# Altium PCB PCB2.PcbDoc
Units mm, origin at the board's own origin, x right, y up, seen from the top; angles counter-clockwise.
Board outline 112.65 x 45.59 mm, 2 copper layers (Top Layer, Bottom Layer); 16 components, 10 nets, 45 pads, 0 vias.
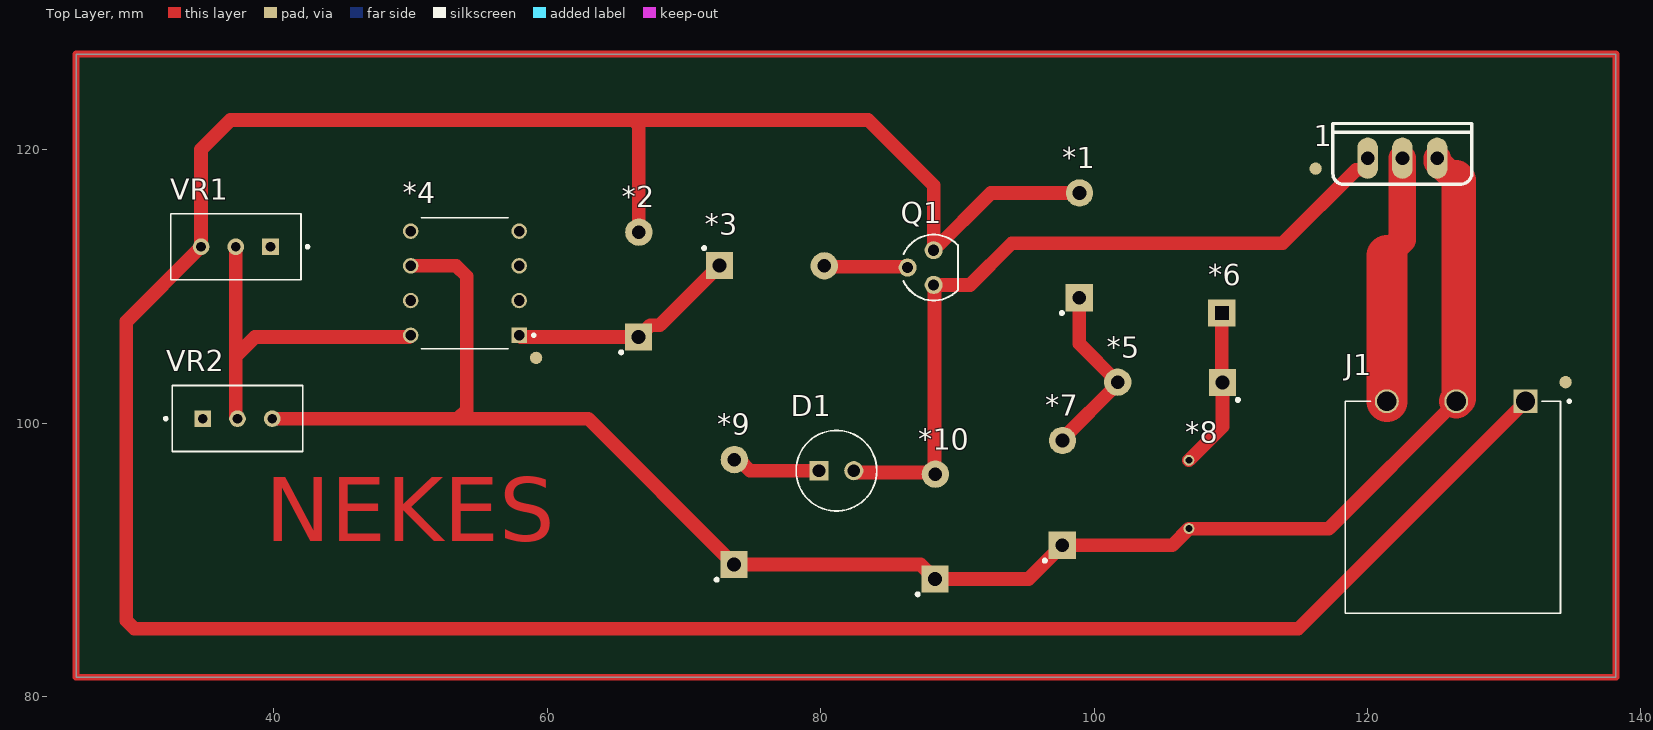
[diagram p0: Top Layer view]
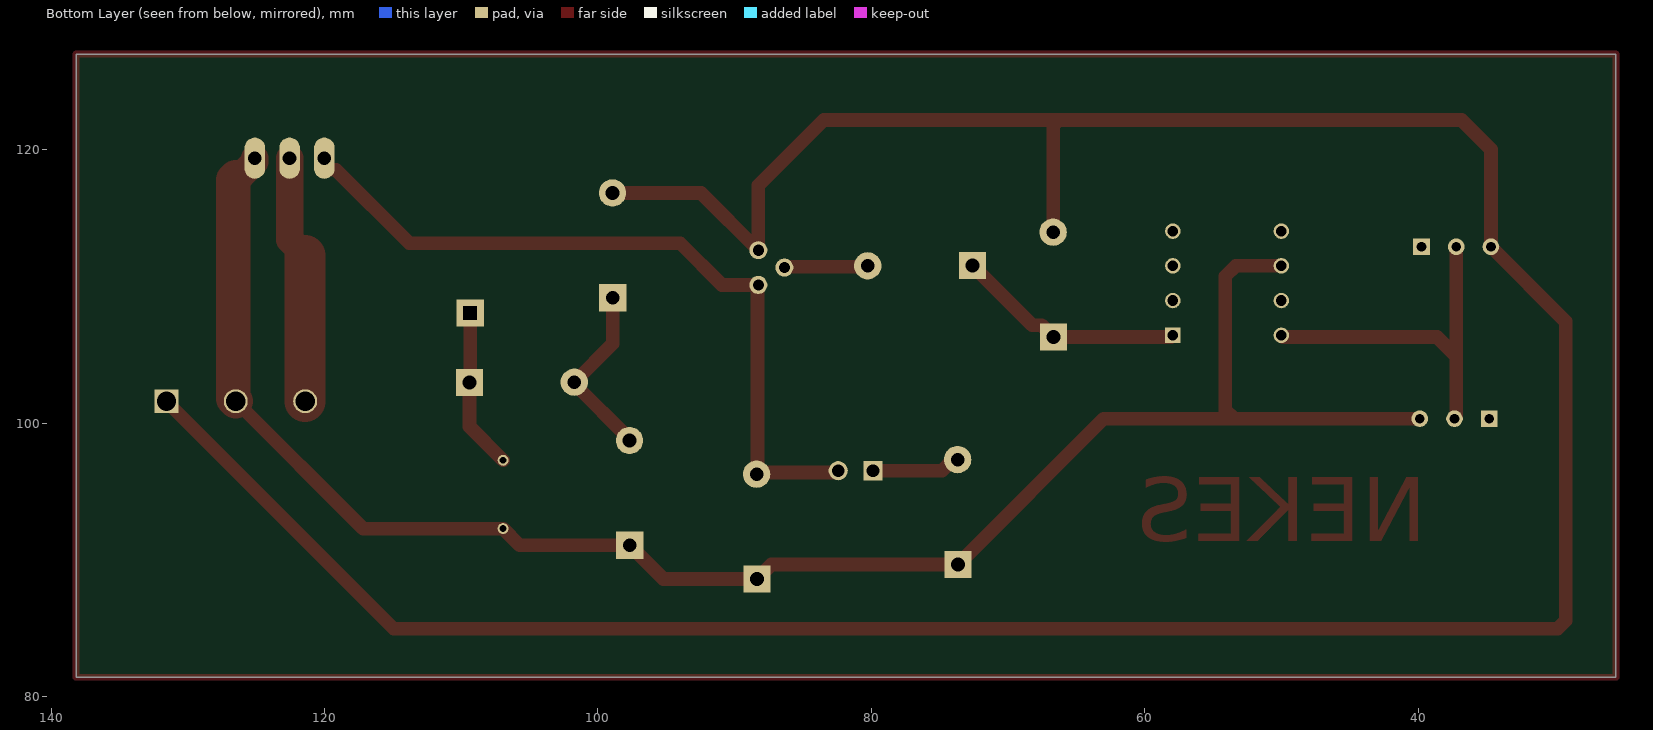
[diagram p1: Bottom Layer view, seen from below]
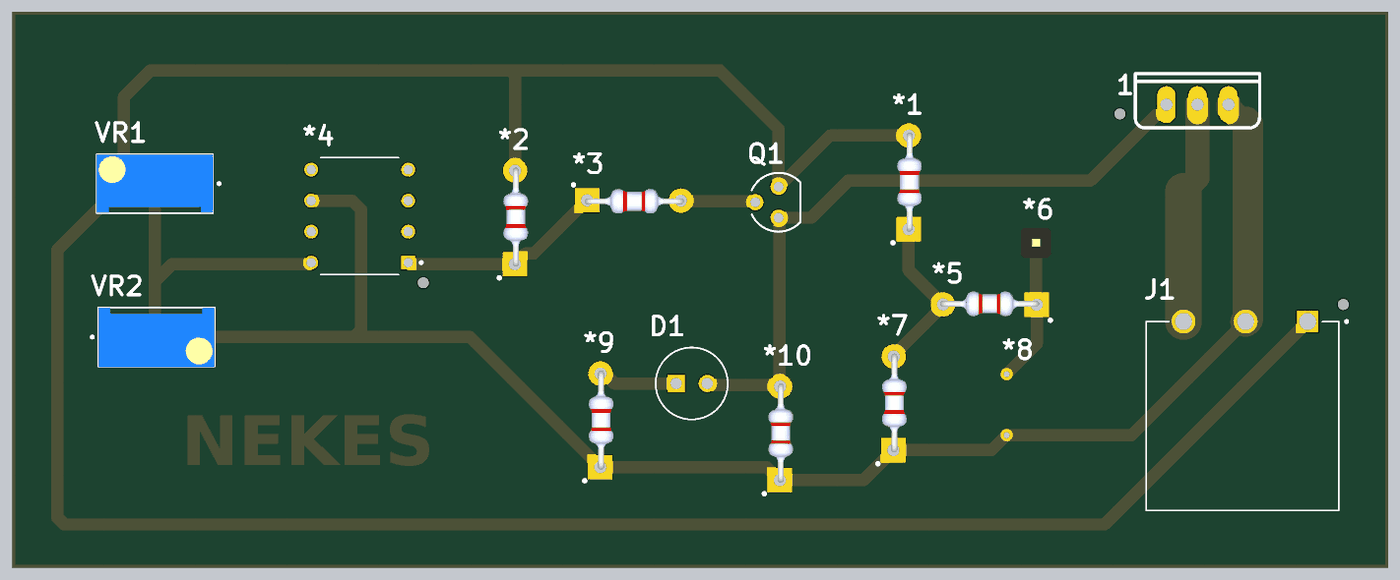
[diagram p2: 3D render of the assembled board from above, using the file's embedded part models]

## Layer stack, top to bottom
Top Solder: solder mask 0.0102, Solder Resist, Dk 3.5
Top Layer: signal copper 0.0356
Dielectric 1: dielectric 0.32, FR-4, Dk 4.8
Bottom Layer: signal copper 0.0356
Bottom Solder: solder mask 0.0102, Solder Resist, Dk 3.5

## Board outline
25.527,81.407 138.176,81.407 138.176,127 25.527,127

## Design rules (kind name [scope] priority, off if disabled: settings)
Clearance [All] p1: gap=0.254 ignorepadtopadclearanceinfootprint=FALSE except(0: Arc-Hole Track-Hole SMDPad-Hole THPad-Hole Via-Hole Fill-Hole Poly-Hole Region-Hole Text-Hole)
PolygonConnect [All] p1: connectstyle=Relief reliefconductorwidth=0.254 reliefentries=4 polygonreliefangle="90 Angle" airgapwidth=0.254
RoutingVias [All] p1: holewidth=0.711 width=1.27 viastyle="Through Hole" minholewidth=0.711 minwidth=1.27 maxholewidth=0.711 maxwidth=1.27
SolderMaskExpansion [All] p1: expansion=0.102 istentingtop=FALSE
Width [All] p1: maxlimit=5 minlimit=0.254 preferedwidth=0.254 minimp=50.000000 maximp=50.000000 favimp=50.000000
30 further rules are at their usual default settings.

## Components (designator, comment, footprint, x,y, rotation, side; value= is the part's Value field where it differs from the comment)
1 "IRFZ44NPBF" IRFZ44N 122.555,119.38 r0 top
*1 "100 resistor" "100 resistor" 98.908,109.144 r90 top
*2 "100 resistor" "100 resistor" 66.675,106.274 r90 top
*3 "100 resistor" "100 resistor" 72.568,111.531 r0 top
*4 "TL431" TL431_DIP8 53.975,110.236 r180 top
*5 "100 resistor" "100 resistor" 109.423,102.972 r180 top
*6 "1 pin header" 1pinheader 109.347,108.077 r0 top
*7 "100 resistor" "100 resistor" 97.663,91.034 r90 top
*8 "10nf_kutupsuz" 10NF_KUTUPSUZ 106.934,92.282 r90 top
*9 "100 resistor" "100 resistor" 73.66,89.637 r90 top
*10 "100 resistor" "100 resistor" 88.367,88.57 r90 top
D1 "LED_5MM" LED_5MM 81.153,96.52 r0 top
J1 "3_terminal" 3_terminal 131.572,101.6 r180 top
Q1 "BC557" BC557 88.265,111.379 r90 top
VR1 "COK_TURLU_POT" COK_TURLU_POT 37.211,112.903 r180 top
VR2 "COK_TURLU_POT" COK_TURLU_POT 37.338,100.33 r0 top

## Footprints (in the part's own frame and the unit in brackets; to place one, negate y for a bottom-side part, rotate by r counter-clockwise, add the part's x,y. Pads: shape width x height; smd on the part's side, far side on the other; paste and mask are expansions set on the pad)
1pinheader [mm]
  rect 2x2 hole 1 square: 1(0,-0.025)
  body extent -1.27,-1.27 1.27,1.22, height 8.64
3_terminal [mm]
  rect 1.75x1.75 hole 1.4: 1(0,0)
  round 1.75 hole 1.4: 2(5.08,0) 3(10.16,0)
  silkscreen extent -3.29,-0.1 13.2,15.5
10NF_KUTUPSUZ [mm]
  round 0.8 hole 0.5: 1(0,0) 2(5,0)
"100 resistor" [mm]
  rect 2x2 hole 1 mask+0.05: 1(0.025,0)
  round 2 hole 1 mask+0.05: 2(7.696,-0.025)
  silkscreen extent -1.18,1.18 -1,1.36, body extent -0.16,-1.08 7.94,0.92, height 2
BC557 [mil]
  round 52 hole 32: B(0,75) C(-50,0) E(50,0)
  silkscreen extent -95,-70 95,87
COK_TURLU_POT [mm]
  rect 1.218x1.218 hole 0.71: 1(-2.54,0)
  round 1.218 hole 0.71: 2(0,0) 3(2.54,0)
  silkscreen extent -5.35,-2.41 4.76,2.42, body extent -4.76,-2.42 4.76,2.41, height 11.55
IRFZ44N [mm]
  oval 1.508x3.016 hole 1: 1(-2.54,0) 2(0,0) 3(2.54,0)
  silkscreen extent -5.08,-1.91 5.08,2.54
LED_5MM [mm]
  round 1.4 hole 0.93: A(1.27,0)
  rect 1.4x1.4 hole 0.93: C(-1.27,0)
  silkscreen extent -2.95,-2.95 2.95,2.95
TL431_DIP8 [mm]
  rect 1.13x1.13 hole 0.78: 1(-3.97,3.81)
  round 1.13 hole 0.78: 2(-3.97,1.27) 3(-3.97,-1.27) 4(-3.97,-3.81) 5(3.97,-3.81) 6(3.97,-1.27) 7(3.97,1.27) 8(3.97,3.81)
  silkscreen extent -5.13,-4.79 3.18,4.79

## Part data
1: "RoHS Compliant", Package="TO-220 Infineon", Availability=Unavailable, MF=Infineon, MP=IRFZ44NPBF, Price=None, SnapEDA_Link=https://www.snapeda.com/parts/IRFZ44NPBF/Infineon%20Technologies/view-part/1662576/?ref=snap
D1: "LED; 5mm; green; 5-32mcd; 60Â°; Front: convex", Package="CDIP-28 Kingbright", Availability=Unavailable, MF=Kingbright, MP=L-53GD, Price=None, SnapEDA_Link=https://www.snapeda.com/parts/L-53GD/Kingbright/view-part/525636/?ref=snap
J1: "3 POS 5.08MM TERMI-BLOK", Package=None, Availability=Unavailable, EU_RoHS_Compliance="Compliant with Exemptions", MF="TE Connectivity", MP=1546073-3, Price=None, SnapEDA_Link=https://www.snapeda.com/parts/1546073-3/TE%20Connectivity/view-part/584203/?ref=snap, TE_purchase_URL=https://www.te.com/usa-en/product-1546073-3.html?te_bu=Cor&te_type=disp&te_campaign=seda_glo_cor-seda-global-disp-prtnr-fy19-seda-model-bom-cta_sma-317_1&elqCampaignId=32493
Q1: "Bipolar _BJT_ Transistor PNP 45V 100mA 150MHz 500mW Through Hole TO-92-3", Package="TO-92 Rochester Electronics", Availability=Unavailable, MF=ON, MP=BC557, Price=None, SnapEDA_Link=https://www.snapeda.com/parts/BC557/ON%20Semiconductor/view-part/681642/?ref=snap
VR1 VR2: "30 kOhms 0.5W, 1/2W PC Pins Through Hole Trimmer Potentiometer Cermet 25 Turn Top Adjustment", Package="SOT-23-5 Bourns", Availability=Unavailable, Check_prices=https://www.snapeda.com/parts/3296W-1-303/Bourns/view-part/1485011/?ref=eda, MF=Bourns, MP=3296W-1-303, Price=None, SnapEDA_Link=https://www.snapeda.com/parts/3296W-1-303/Bourns/view-part/1485011/?ref=snap

## Free pads (board coordinates)
  round 0.9 smd: 2(59.182,104.775) 3(134.493,102.997) 4(116.205,118.618)

## Nets (pads, with @x,y where several pads share a name; then routed paths per layer and width w, separated by ;. In a path a pad name is that pad's centre, name@x,y a point inside that pad or via, vN(x,y) a via of type N, cw(c..) or ccw(c..) an arc to the next point about the centre after c; other vN are vias at no path point)
GND: 1.3 *4.6 *7.1 *8.1 *9.1 *10.1 J1.2 VR2.3 | length 130.6
  Top Layer w1: VR2.3 53.467,100.33 ; *4.6 53.34,111.506 54.102,110.744 54.102,100.965 53.467,100.33 ; J1.2 117.174,92.282 *8.1 105.711,91.059 *7.1 95.199,88.595 *10.1 87.3,89.662 *9.1 62.992,100.33 53.467,100.33
  Top Layer w2: 1.3 125.095,119.118 126.23,117.983 126.492,117.983
  Top Layer w2.5: J1.2 126.67,101.778 126.67,117.805 126.492,117.983
Net1_1: 1.1 *10.2 D1.A Q1.C | length 55.8
  Top Layer w1: D1.A 82.55,96.393 88.265,96.393 *10.2@88.328,96.329 ; *10.2 *10.2@88.328,96.329 ; 1.1 120.015,118.763 119.78,118.529 119.164,118.529 113.792,113.157 93.98,113.157 90.932,110.109 Q1.C 88.328,110.045 *10.2@88.328,96.329
Net1_2: 1.2 J1.3 | length 18.3
  Top Layer w2: 121.412,112.268 122.555,113.411 1.2
  Top Layer w3: J1.3 121.412,112.268
Net*1_1: *1.1 *5.2 *7.2 | length 13.3
  Top Layer w1: *7.2 97.688,98.844 101.727,102.883 *5.2 98.908,105.816 *1.1
Net*2_1: *2.1 *3.1 *4.1 | length 16.9
  Top Layer w1: *4.1 58.072,106.299 *2.1 67.548,107.172 68.234,107.172 *3.1
Net*3_2: *3.2 Q1.B | length 6.1
  Top Layer w1: *3.2 80.328,111.442 86.296,111.442 Q1.B
Net*4_8: *4.8 VR1.2 VR2.2 | length 25.9
  Top Layer w1: VR1.2 37.211,100.516 37.338,100.389 VR2.2 ; 37.338,105.029 38.608,106.299 49.878,106.299 *4.8
Net*5_1: *5.1 *6.1 *8.2 | length 11.8
  Top Layer w1: *8.2 109.398,99.746 *5.1 109.347,103.022 *6.1
Net*9_2: *9.2 D1.C | length 6.5
  Top Layer w1: *9.2 74.013,97.333 74.826,96.52 D1.C
VCC: *1.2 *2.2 J1.1 Q1.E VR1.3 | length 228.4
  Top Layer w1: *2.2 66.7,121.768 66.294,122.174 ; *1.2@98.806,116.967 *1.2 92.456,116.84 Q1.E 88.265,117.392 83.461,122.196 83.439,122.174 66.294,122.174 ; J1.1 114.935,84.963 29.796,84.963 29.21,85.549 29.21,107.442 VR1.3 34.671,120.015 36.83,122.174 66.294,122.174
pads on no net: *4.2 *4.3 *4.4 *4.5 *4.7 VR1.1 VR2.1
copper on no net: | length 316.5
  Top Layer w0.5: 25.527,81.407 138.176,81.407 138.176,127 25.527,127 25.527,81.407

## Other copper
Top Layer:
  text "NEKES" at 39.378,89.836 h8